# Altium PCB Dimmer_PCB.PcbDoc
Units mil, origin at the board's own origin, x right, y up, seen from the top; angles counter-clockwise.
Board outline 1430 x 1968.5 mil, 2 copper layers (Top Layer, Bottom Layer); 13 components, 9 nets, 28 pads, 0 vias.
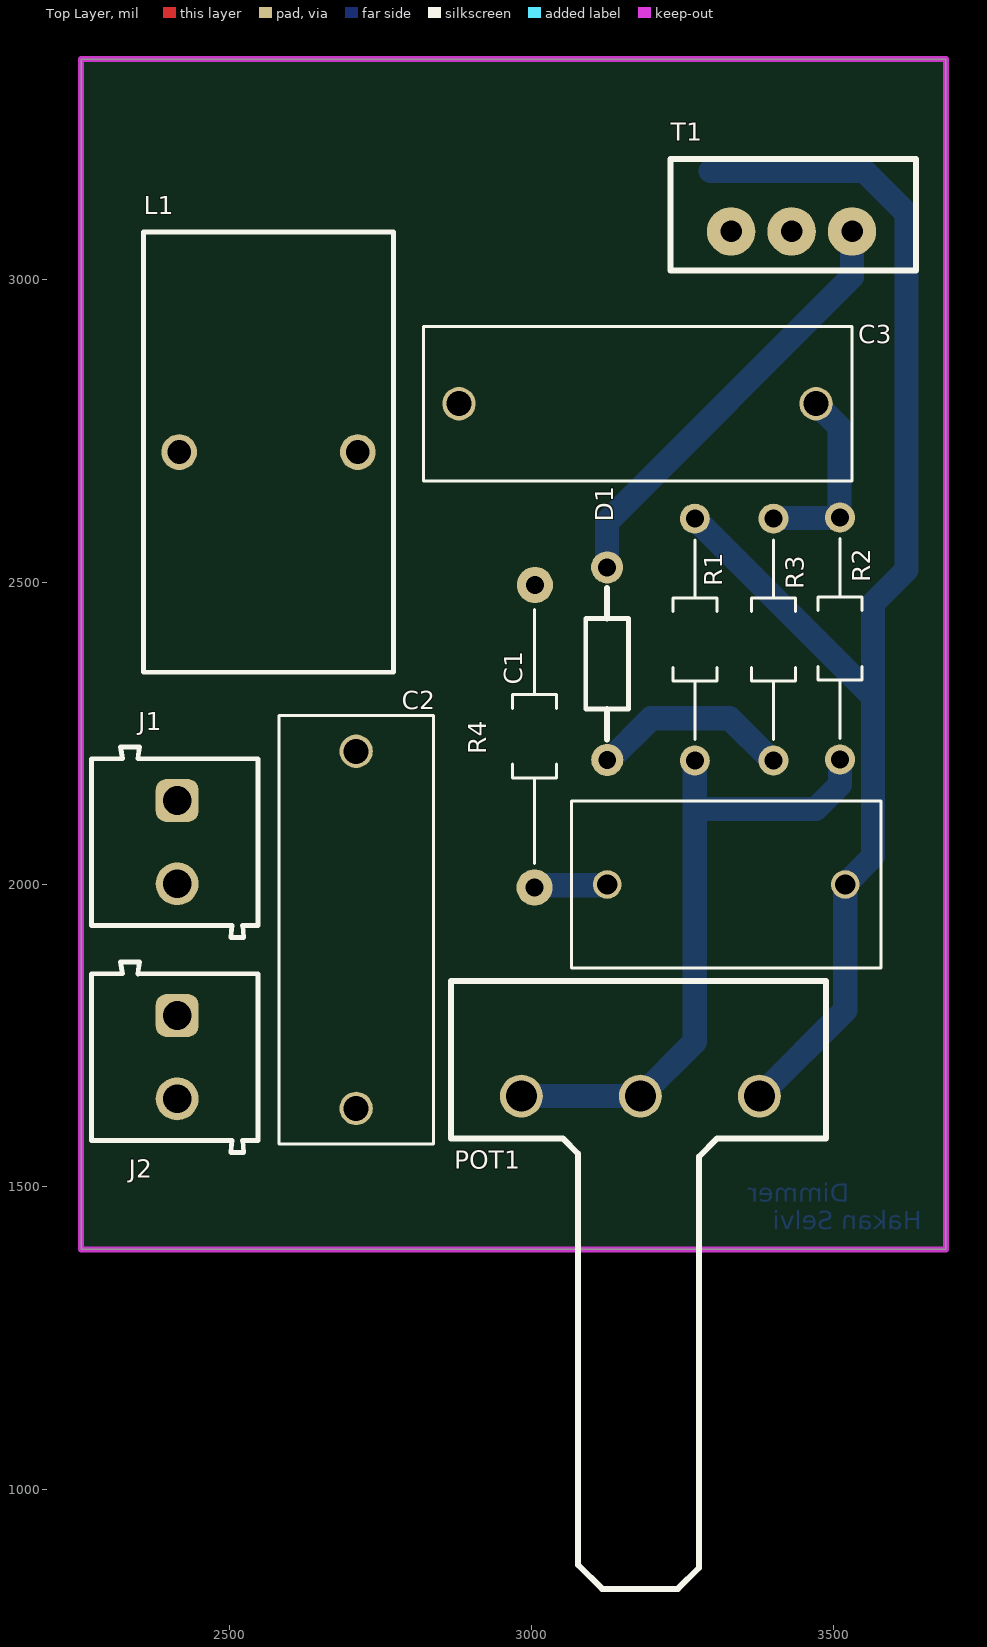
[diagram p0: Top Layer view]
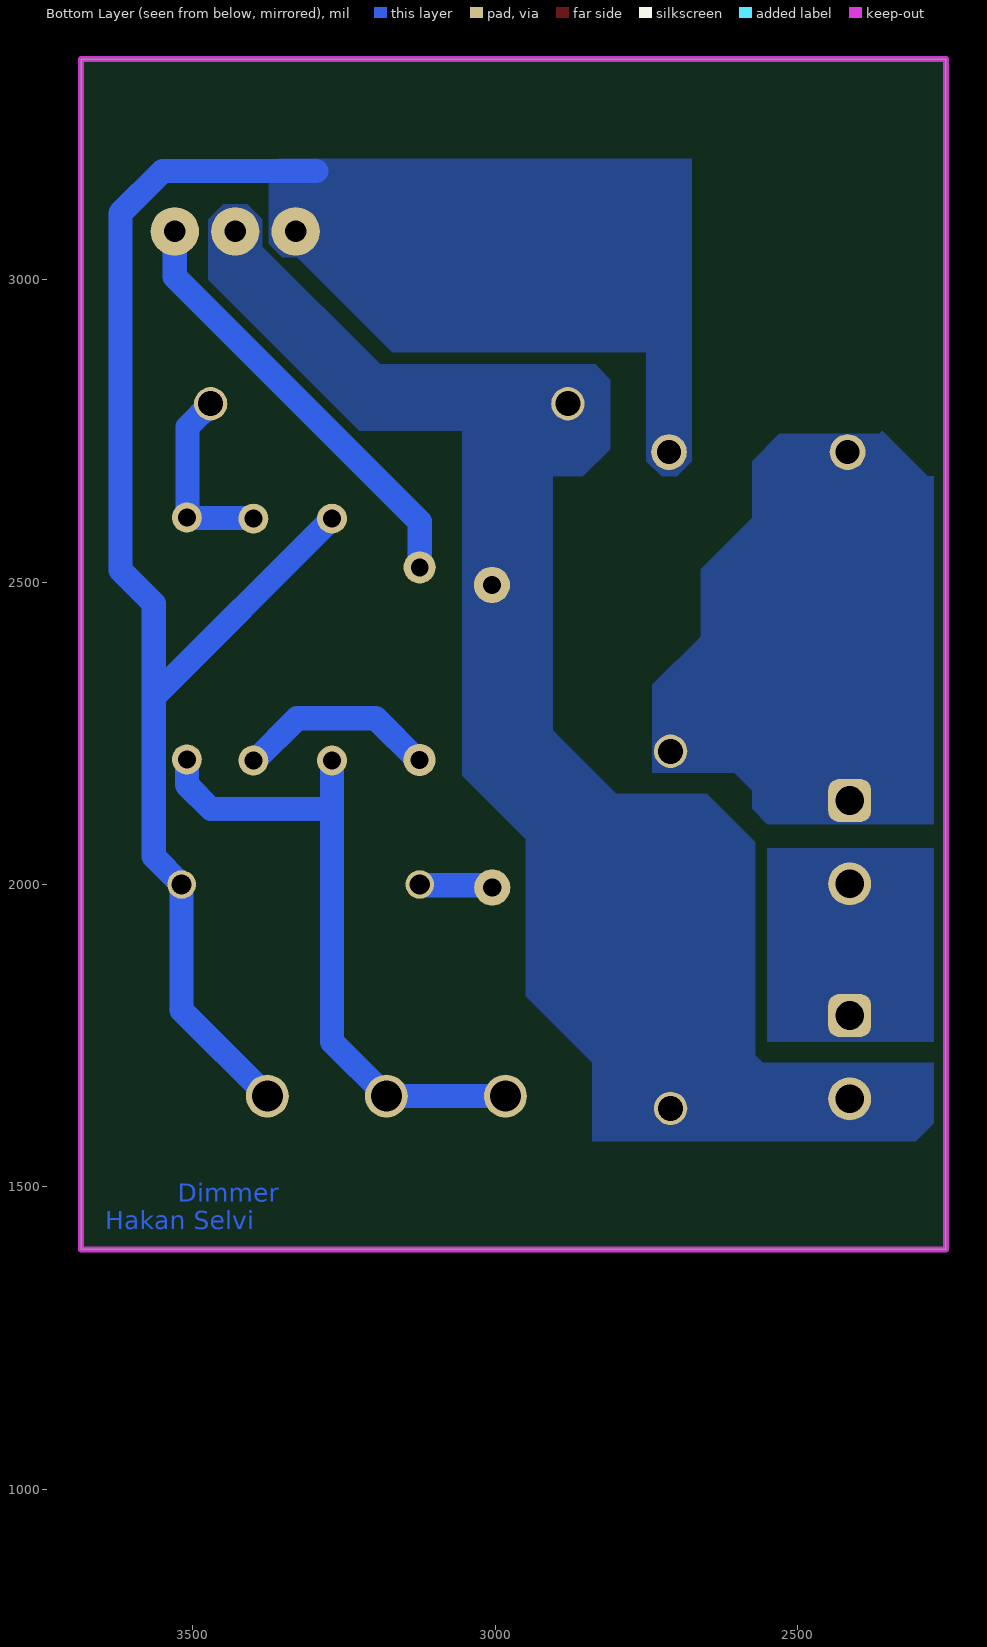
[diagram p1: Bottom Layer view, seen from below]
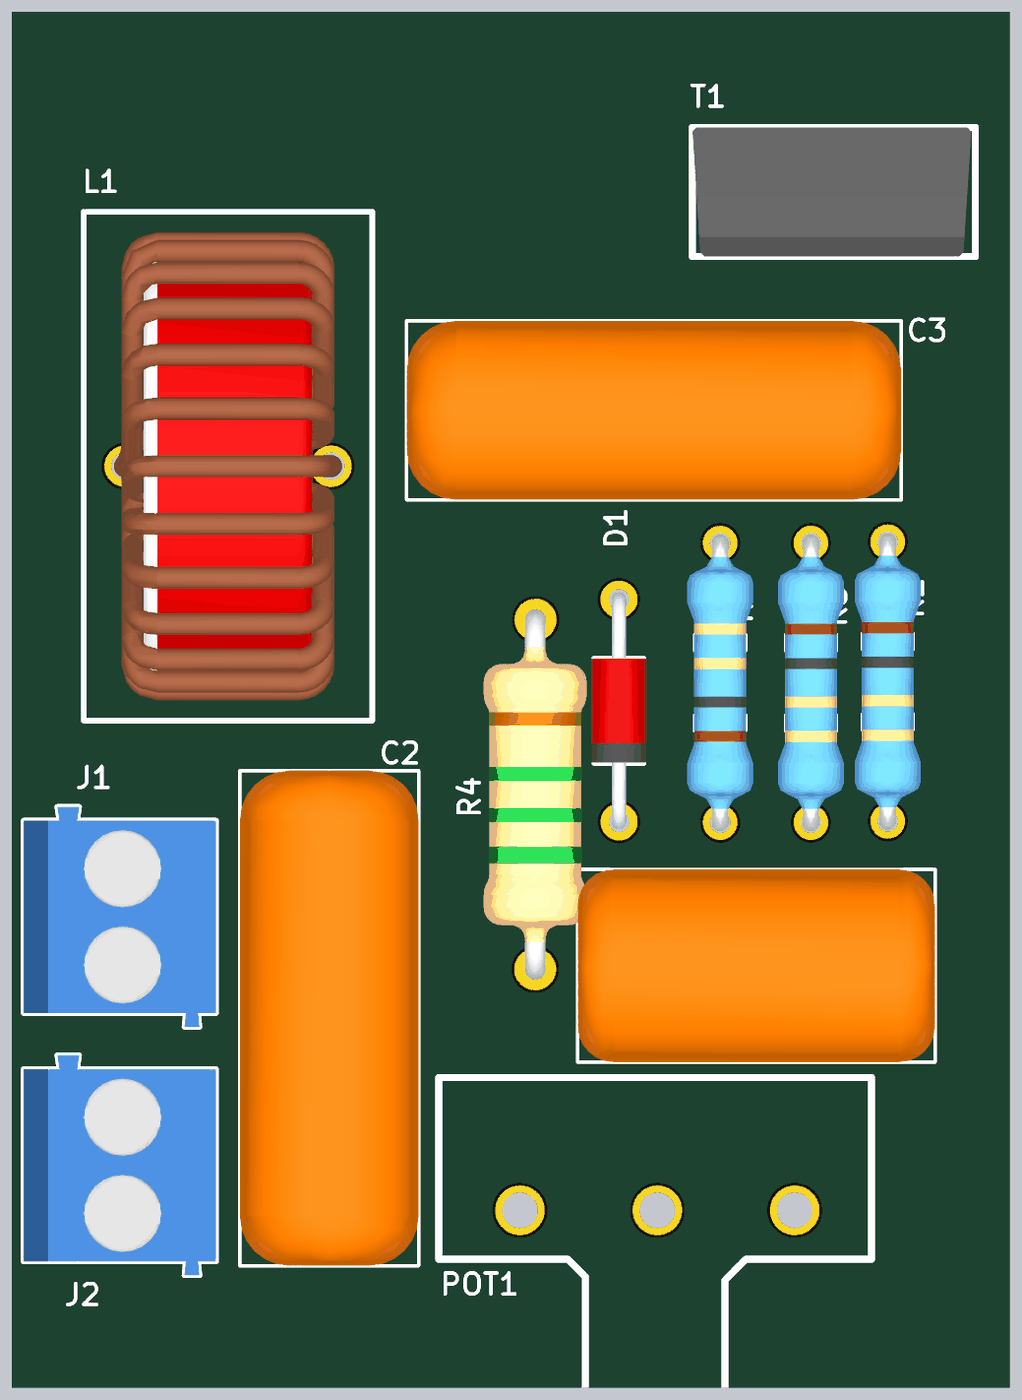
[diagram p2: 3D render of the assembled board from above, using the file's embedded part models]

## Layer stack, top to bottom
Top Solder: solder mask 0.4, Solder Resist, Dk 3.5
Top Layer: signal copper 1.4
Dielectric 1: dielectric 12.6, FR-4, Dk 4.8
Bottom Layer: signal copper 1.4
Bottom Solder: solder mask 0.4, Solder Resist, Dk 3.5

## Board outline
2255,1396.5 2255,3365 3685,3365 3685,1396.5

## Design rules (kind name [scope] priority, off if disabled: settings)
Clearance [All] p1: gap=10 ignorepadtopadclearanceinfootprint=FALSE except(0: Arc-Hole Track-Hole SMDPad-Hole THPad-Hole Via-Hole Fill-Hole Poly-Hole Region-Hole Text-Hole)
PolygonConnect [All] p1: connectstyle=Direct reliefconductorwidth=10 reliefentries=4 polygonreliefangle="90 Angle" airgapwidth=10
RoutingVias [All] p1: holewidth=28 width=50 viastyle="Through Hole" minholewidth=28 minwidth=50 maxholewidth=28 maxwidth=50
SilkToSilkClearance [All] p1 off: silktosilkclearance=10
SilkToSolderMaskClearance [IsPad] p1 off: minsilkscreentomaskgap=10 clearancetoexposedcopper=TRUE
SolderMaskExpansion [All] p1: expansion=4 istentingtop=FALSE
Width [All] p1: maxlimit=200 minlimit=10 preferedwidth=25 minimp=50.000000 maximp=50.000000 favimp=50.000000
28 further rules are at their usual default settings.

## Components (designator, comment, footprint, x,y, rotation, side; value= is the part's Value field where it differs from the comment)
C1 "47nF 630V 10mm" 10mm_CAP 3321.85,2000 r0 top
C2 "100nF 630V 15mm" 15mm_cap 2710,1925 r90 top
C3 "100nF 630V 15mm" 15mm_cap 3175.28,2795 r0 top
D1 "Diac" DB3 3125,2365 r90 top
J1 "691103110002" 691103110002 2410,2070 r270 top
J2 "691103110002" 691103110002 2410,1714.41 r270 top
L1 "90µH" 7447013 2565,2715 r90 top
POT1 "250k POT" Potentiometers 3376.85,1650 r180 top
R1 "470k 1/4W" "1/4W axial" 3270,2405 r270 top
R2 "2.2k 1/4W" "1/4W axial" 3510,2406.81 r90 top
R3 "10K 1/2W" "1/4W axial" 3400,2405 r90 top
R4 "330R 1/2W" "1/2 axial" 3005,2245 r90 top
T1 "TRIAC" TO-220 3430,3080 r0 top

## Footprints (in the part's own frame and the unit in brackets; to place one, negate y for a bottom-side part, rotate by r counter-clockwise, add the part's x,y. Pads: shape width x height; smd on the part's side, far side on the other; paste and mask are expansions set on the pad)
"1/2 axial" [mil]
  round 60 hole 30: 1(-250,0) 2(250.27,-0.55)
  silkscreen extent -210,-36 210,36, body extent -265,-74 265,74, height 148
"1/4W axial" [mm]
  round 1.258 hole 0.75: 1(-5.08,0) 2(5.08,0)
  silkscreen extent -4.19,-0.92 4.19,0.92, body extent -5.38,-1.19 5.38,1.19, height 2.41
10mm_CAP [mm]
  round 1.2 hole 0.85: 1(-5,0) 2(5,0)
  silkscreen extent -6.5,-3.5 6.5,3.5, body extent -6.5,-3.5 6.5,3.5, height 16.1
15mm_cap [mm]
  round 1.4 hole 1.05: 1(-7.5,0) 2(7.5,0)
  silkscreen extent -9,-3.25 9,3.25, body extent -9,-3.25 9,3.25, height 15
7447013 [mm] "Leaded Toroidal Line Choke, 2-leads, body 18.5x10.5mm"
  round 1.5 hole 1: 1(0,3.75) 2(0,-3.75)
  silkscreen extent -9.25,-5.25 9.25,5.25, body extent -8.51,-4.15 8.51,4.15, height 16.81
691103110002 [mm] "3,50mm - modular - blue - Horizontal wire entry - Pressure clamp - 8,4mm height - 02p"
  rrect50% 1.8x1.8 hole 1.2: 1(-1.75,0.1)
  round 1.8 hole 1.2: 2(1.75,0.1)
  silkscreen extent -4,-3.5 4,3.5, body extent -4,-3.5 4,3.5, height 8.45
DB3 [mm]
  round 1.35 hole 0.75: 1(-4.039,-0.005) 2(4.05,0)
  silkscreen extent -3.17,-0.9 3.17,0.9, body extent -4.3,-1 4.3,1, height 2
Potentiometers [mm]
  round 1.8 hole 1.3: 1(0,0) 2(5,0) 3(10,0)
  silkscreen extent -2.79,-4.83 12.95,20.7, body extent -2.79,-4.83 12.95,20.73, height 20.08
TO-220 [mil]
  round 80 hole 35.43: 1(-100,0) 2(0,0) 3(100,0)
  silkscreen extent -200,-65 206,120, body extent -200,-65 200,120, height 782

## Part data
C1: "CAP.POL.47nF 630VDC 10MM 10% MKT FARATRONIC"
C2 C3: "CAP.POL.100nF 630VDC 15MM 10% MKP DAMLA BULK FARAT"
D1: library part DB3, "Diac/Sidac Thyristor 30 ~ 34V DO-35", Package="DO-35 STMicroelectronics", Availability="In Stock", Check_prices=https://www.snapeda.com/parts/DB3TG/STMicroelectronics/view-part/?ref=eda, MF=STMicroelectronics, MP=DB3TG, price=None, Purchase-URL=https://pricing.snapeda.com/search/part/DB3TG/?ref=eda, SnapEDA_Link=https://www.snapeda.com/parts/DB3TG/STMicroelectronics/view-part/?ref=snap
J1 J2: "WR-TBL Series 1031 Horizontal Entry Modular, THT, pitch 3.5mm, 2p", Manufacturer="Wurth Elektronik", Operating Temperature Max=105°C, Operating Temperature Min=-40°C, Rated Current=10A, Working Voltage=125V, Application="Pressure Clamp", Category="Terminal Blocks", ComponentLink1Description="Website Link", ComponentLink1URL=https://www.we-online.com/redexpert/article/691103110002?ad, ComponentLink2Description="Datasheet Link", ComponentLink2URL=https://www.we-online.com/redexpert/spec/691103110002?ad, Manufacturer Part Number=691103110002, Match Code=WR-TBL, Modularity=Yes, Mount="Through Hole", Number of Pins=2, Number of Rows=1, Orientation=Horizontal, Packaging=Box, Pitch=3.5mm
L1: library part "90uH Toroidal Line Choke", "WE-FI THT Leaded Toroidal Line Choke, 90µH, 4.6A, 0.04Ω", DC Resistance Max=0.04Ω, Manufacturer="Wurth Elektronik", Manufacturer Part Number=7447013, Operating Temperature Max=105°C, Operating Temperature Min=-40°C, Rated Current=4.6A, Category="Filter Chokes", ComponentLink1Description="Website Link", ComponentLink1URL=https://www.we-online.com/redexpert/article/7447013?ad, ComponentLink2Description="Datasheet Link", ComponentLink2URL=https://www.we-online.com/redexpert/spec/7447013?ad, Height=18.5mm, Length=18.5mm, Match Code=WE-FI, Mount="Through Hole", Packaging=Tray, Width=10.5mm, Inductance=90µH
POT1: library part Potentiometer, "POT 220K 0.125W 1 TURN CARBON LINEAR ±20%"
R1: library part "470K 1/4W axial", "407 1/4W axial resistor"
R2: library part "2.2K 1/24 axial", "2.2K axial resistor"
R3: library part "10K 1/2W axial", "10K 1/4W resistor"
R4: library part "330R 1/2W axial", "330R 1/2W axial"
T1: "TRIAC Standard 800 V XA Through Hole TO-220AB"

## Nets (pads, with @x,y where several pads share a name; then routed paths per layer and width w, separated by ;. In a path a pad name is that pad's centre, name@x,y a point inside that pad or via, vN(x,y) a via of type N, cw(c..) or ccw(c..) an arc to the next point about the centre after c; other vN are vias at no path point)
GND: J1.2 J2.1
NetC1_1: C1.1 R4.1 | length 122.1
  Bottom Layer w40: R4.1 3008.61,1998.61 3123.61,1998.61 C1.1
NetC1_2: C1.2 L1.2 POT1.1 R1.1 T1.1 | length 2330.7
  Bottom Layer w40: R1.1 3564.76,2310.24 ; 3295.92,3180 3550,3180 3620,3110 3620,2520 3564.76,2464.76 3564.76,2310.24 ; POT1.1 3518.7,1791.85 C1.2 3564.76,2046.06 3564.76,2310.24
NetC2_1: C2.1 C3.1 J2.2 R4.2 T1.2
NetC2_2: C2.2 J1.1 L1.1
NetC3_2: C3.2 R2.2 R3.2 | length 315.8
  Bottom Layer w40: R3.2 3400.91,2605.91 R2.2@3509.09,2605.91 ; C3.2 3509.09,2756.46 R2.2@3509.09,2605.91 ; R2.2 R2.2@3509.09,2605.91
NetD1_1: D1.1 R3.1 | length 332.4
  Bottom Layer w40: D1.1 3128.76,2205.99 3197.77,2275 3327.42,2275 3397.42,2205 R3.1
NetD1_2: D1.2 T1.3 | length 723.3
  Bottom Layer w40: D1.2 3125,2600 3530,3005 T1.3
NetPOT1_2: POT1.2 POT1.3 R1.2 R2.1 | length 1090.1
  Bottom Layer w40: POT1.3 POT1.2 3270,1740 3270,2125 ; R1.2@3272.58,2205 R1.2 3270,2125 ; R2.1 3510,2165 3470,2125 3270,2125

## Polygon pours and split planes (outlines as drawn)
NetC2_1 on Bottom Layer "NETC2_1_L02_P005" (solid, pour order 5): 3055,2750 3225,2750 3475,3000 3475,3100 3450,3125 3410,3125 3385,3100 3385,3055 3190,2860 2835,2860 2810,2835 2810,2720 2855,2675 2905,2675 2905,2255 2800,2150 2650,2150 2570,2070 2570,1717.5 2557.5,1705 2275,1705 2275,1605 2305,1575 2840,1575 2840,1705 2950,1815 2950,2075 3055,2180
NetC1_2 on Bottom Layer "NETC1_2_L02_P002" (solid, pour order 2): 3327.5,3037.5 3352.5,3037.5 3375,3060 3375,3185 3360,3200 2700,3199.81 2699.81,3200 2675,3200 2675,2700 2700,2675 2725,2675 2750,2700 2750,2880 3170,2880
NetC2_2 on Bottom Layer "NETC2_2_L02_P001" (solid, pour order 1): 2530,2745 2575,2700 2575,2606.25 2660,2521.25 2660,2410 2740,2330 2740,2185 2605,2185 2575,2155 2575,2125 2550,2100 2275,2100 2275,2675 2285,2675 2360,2750 2365,2745
GND on Bottom Layer "GND_L02_P000" (solid, pour order 0): 2275,2060 2550,2060 2550,1740 2275,1740

## Keep-outs
Keep-Out Layer:
  the board outline again, w10

## Other copper
Bottom Layer:
  text "Dimmer" at 3525,1475 h30
  text "Hakan Selvi" at 3645,1430 h30

## Silkscreen, mask and mechanical layers (free items; w line width, h text height)
Bottom Solder:
  text "Dimmer" at 3525,1475 h30
  text "Hakan Selvi" at 3645,1430 h30
  text "Hakan Selvi" at 3645,1430 h30